# EAGLE board SparkFun_Micro_6DoF_LSM6DSV16X-Panel (EAGLE 9.6.2), part 1 of 8
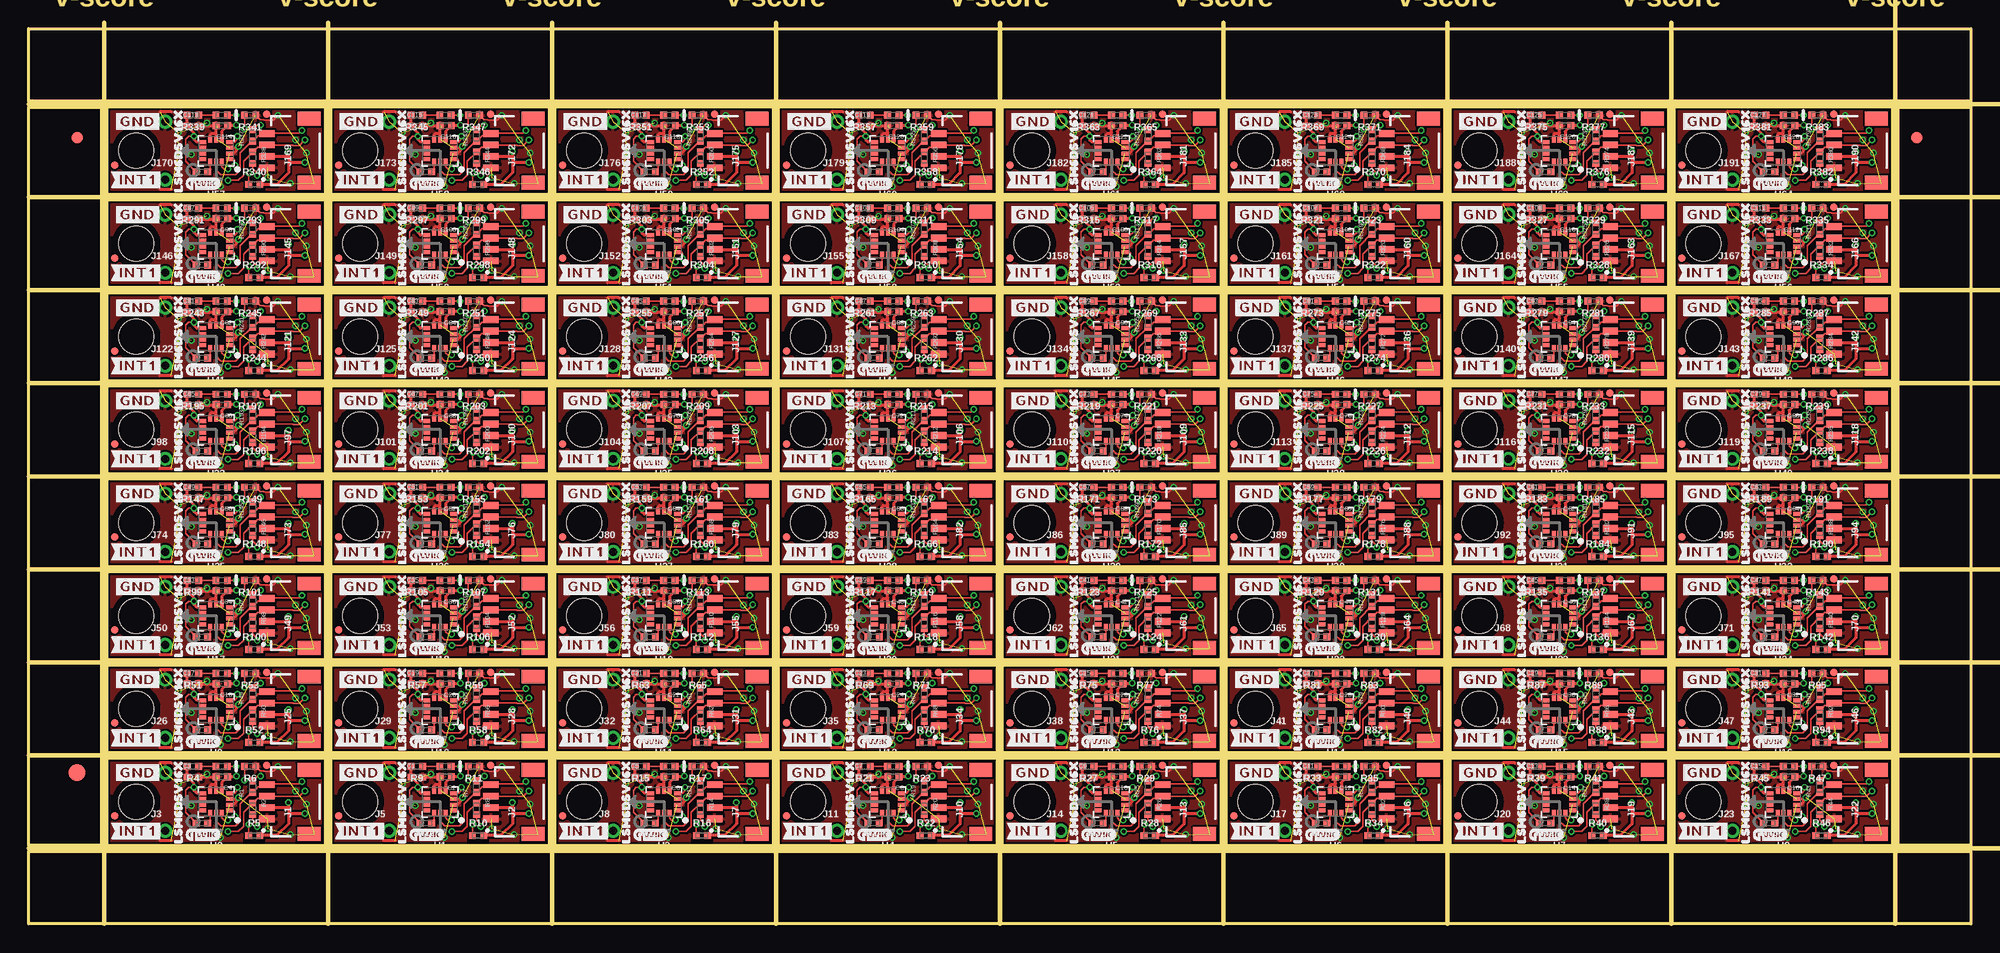
[diagram p0: board, top side]
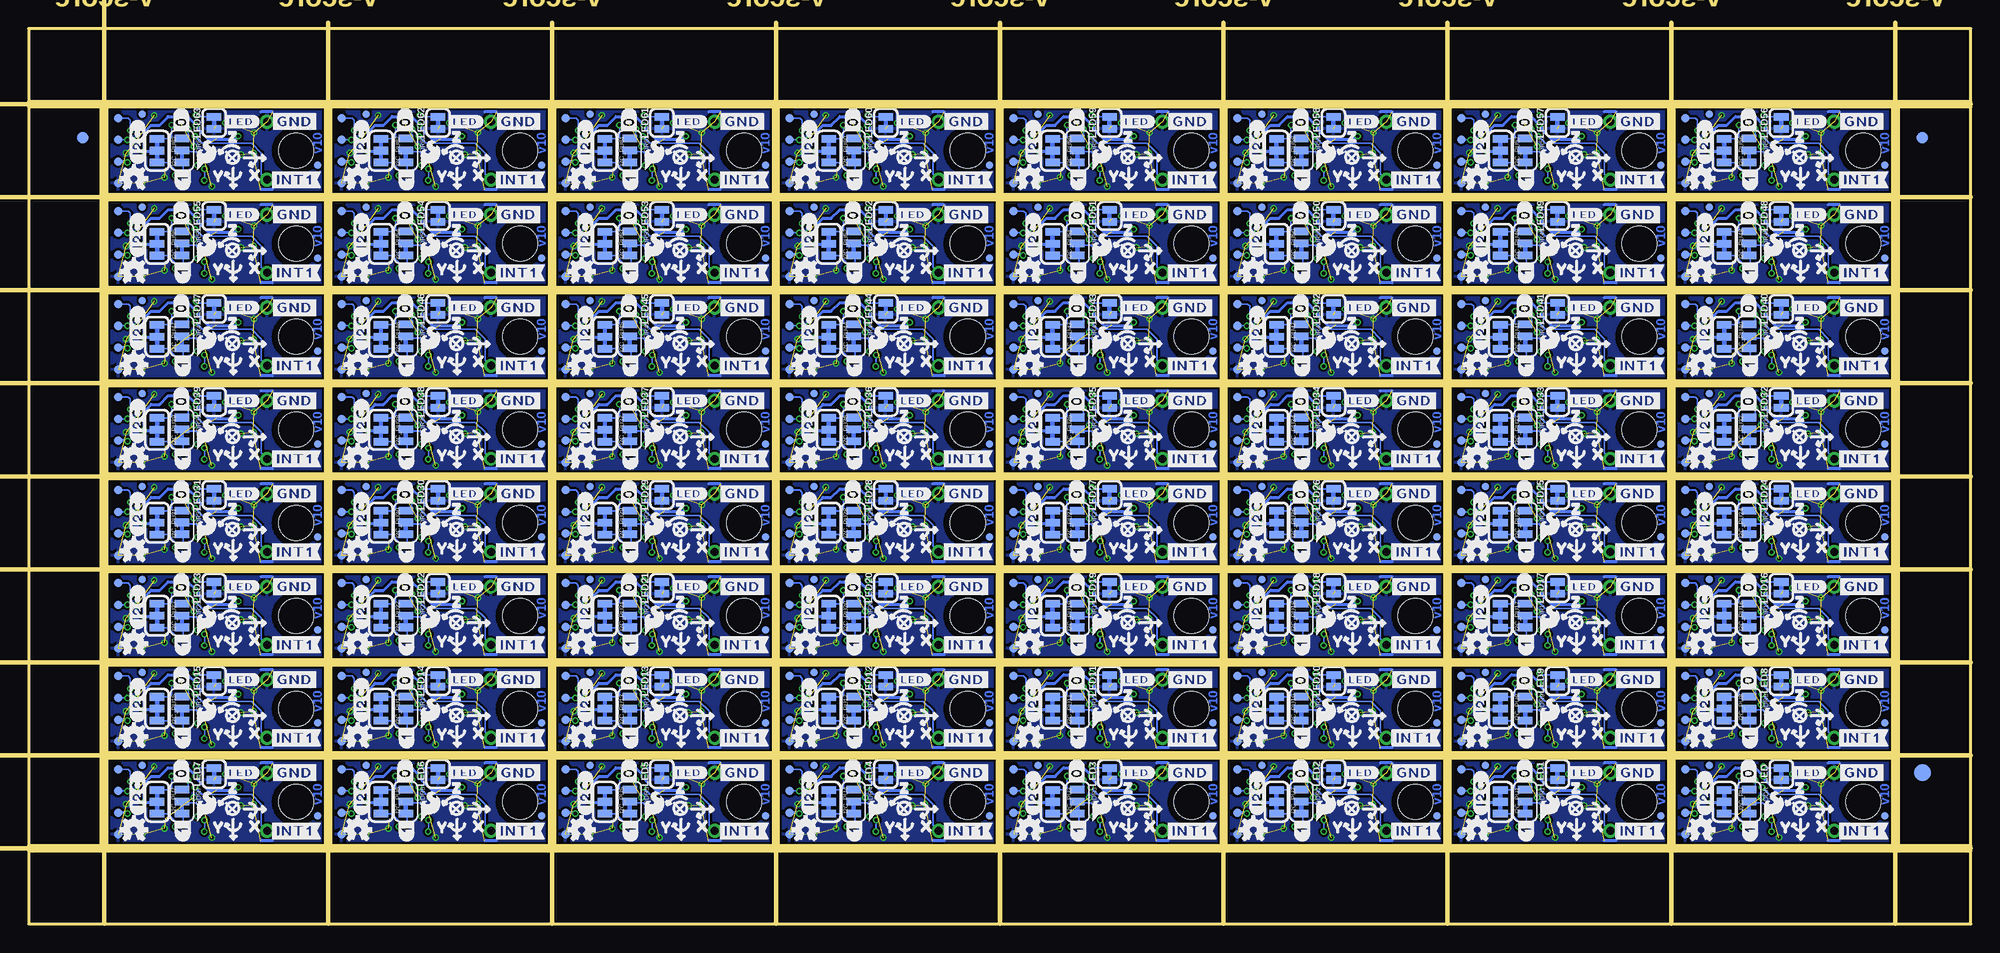
[diagram p1: board, bottom side, seen from below]

Size 169.67 x 78.23 mm. Coordinates in mm from the lower left corner, seen from the top.
Outline: 272 segments
Copper layers (1*16): Top 0.035mm / dielectric 1.5mm / Bottom 0.035mm
Design rules "SparkFun_Micro_6DoF_LSM6DSV16X": minimum track width 5mil, minimum drill 0.3mm, track to track 5mil, track to pad 5mil, pad to pad 5mil, via to via 5mil, smd to smd 5mil, copper to edge 7mil, drill to drill 7mil, minimum pad ring 5mil, minimum via ring 5mil, stop-mask expansion 2.5mil, vias tented up to drill 25mil, thermal gap 10mil
tRestrict: area 17.4,10.6 to 17.7,10.7; area 37,10.6 to 37.2,10.7; area 56.5,10.6 to 56.8,10.7; area 76.1,10.6 to 76.3,10.7; area 95.7,10.6 to 95.9,10.7; area 115.2,10.6 to 115.4,10.7; area 134.8,10.6 to 135,10.7; area 154.3,10.6 to 154.6,10.7; area 17.4,18.8 to 17.7,18.8; area 37,18.8 to 37.2,18.8; area 56.5,18.8 to 56.8,18.8; area 76.1,18.8 to 76.3,18.8; 52 more areas
Milling: 18 lines

## Footprints (pad centres in the part's own frame; a part is rotated, then mirrored left to right if it is on the bottom)
SMT-JUMPER_3_1-NC_TRACE_SILK = smd 0.66 x 1.27: 1 -1.041,0; 2 0,0; 3 1.041,0
0402-TIGHT = smd 0.6 x 0.6: 1 -0.5,0; 2 0.5,0
LED-0402 = smd 0.6 x 0.6: A -0.5,0; C 0.5,0
FIDUCIAL-1X2 = smd 1 x 1: 1 0,0
FIDUCIAL-1.5X3 = smd 1.5 x 1.5: 1 0,0
FIDUCIAL-MICRO = smd 0.635 x 0.635: 1 0,0
SMT-JUMPER_3_2-NC_TRACE_SILK = smd 0.66 x 1.27: 1 -1.041,0; 2 0,0; 3 1.041,0
JST04_1MM_RA = smd 0.6 x 1.35: 1 -1.5,0; 2 -0.5,0; 3 0.5,0; 4 1.5,0 | smd 1.2 x 2: NC1 2.8,-3.675; NC2 -2.8,-3.675
1X01_1MM_NO_SILK = drill 0.7 pad 1.2: 1 0,0
SMT-JUMPER_2_NC_TRACE_SILK = smd 0.66 x 1.27: 1 -0.521,0; 2 0.521,0
STAND-OFF-TIGHT = hole 3.048: 0,0
PAD.03X.03 = smd 0.762 x 0.762: 1 0,0
LGA-14L = smd 0.575 x 0.35: P1 -1.163,0.75; P2 -1.163,0.25; P3 -1.163,-0.25; P4 -1.163,-0.75; P8 1.163,-0.75; P9 1.163,-0.25; P10 1.163,0.25; P11 1.163,0.75 | smd 0.35 x 0.575: P5 -0.5,-1; P6 0,-1; P7 0.5,-1; P12 0.5,1; P13 0,1; P14 -0.5,1

## Placement (x,y rotation side)
ADDR  JUMPER-SMT_3_1-NC_TRACE_SILK  [SMT-JUMPER_3_1-NC_TRACE_SILK]  19.37,10.69 270 bottom
ADDR1  JUMPER-SMT_3_1-NC_TRACE_SILK  [SMT-JUMPER_3_1-NC_TRACE_SILK]  38.93,10.69 270 bottom
ADDR2  JUMPER-SMT_3_1-NC_TRACE_SILK  [SMT-JUMPER_3_1-NC_TRACE_SILK]  58.49,10.69 270 bottom
ADDR3  JUMPER-SMT_3_1-NC_TRACE_SILK  [SMT-JUMPER_3_1-NC_TRACE_SILK]  78.05,10.69 270 bottom
ADDR4  JUMPER-SMT_3_1-NC_TRACE_SILK  [SMT-JUMPER_3_1-NC_TRACE_SILK]  97.61,10.69 270 bottom
ADDR5  JUMPER-SMT_3_1-NC_TRACE_SILK  [SMT-JUMPER_3_1-NC_TRACE_SILK]  117.16,10.69 270 bottom
ADDR6  JUMPER-SMT_3_1-NC_TRACE_SILK  [SMT-JUMPER_3_1-NC_TRACE_SILK]  136.72,10.69 270 bottom
ADDR7  JUMPER-SMT_3_1-NC_TRACE_SILK  [SMT-JUMPER_3_1-NC_TRACE_SILK]  156.28,10.69 270 bottom
ADDR8  JUMPER-SMT_3_1-NC_TRACE_SILK  [SMT-JUMPER_3_1-NC_TRACE_SILK]  19.37,18.82 270 bottom
ADDR9  JUMPER-SMT_3_1-NC_TRACE_SILK  [SMT-JUMPER_3_1-NC_TRACE_SILK]  38.93,18.82 270 bottom
ADDR10  JUMPER-SMT_3_1-NC_TRACE_SILK  [SMT-JUMPER_3_1-NC_TRACE_SILK]  58.49,18.82 270 bottom
ADDR11  JUMPER-SMT_3_1-NC_TRACE_SILK  [SMT-JUMPER_3_1-NC_TRACE_SILK]  78.05,18.82 270 bottom
ADDR12  JUMPER-SMT_3_1-NC_TRACE_SILK  [SMT-JUMPER_3_1-NC_TRACE_SILK]  97.61,18.82 270 bottom
ADDR13  JUMPER-SMT_3_1-NC_TRACE_SILK  [SMT-JUMPER_3_1-NC_TRACE_SILK]  117.16,18.82 270 bottom
ADDR14  JUMPER-SMT_3_1-NC_TRACE_SILK  [SMT-JUMPER_3_1-NC_TRACE_SILK]  136.72,18.82 270 bottom
ADDR15  JUMPER-SMT_3_1-NC_TRACE_SILK  [SMT-JUMPER_3_1-NC_TRACE_SILK]  156.28,18.82 270 bottom
ADDR16  JUMPER-SMT_3_1-NC_TRACE_SILK  [SMT-JUMPER_3_1-NC_TRACE_SILK]  19.37,26.95 270 bottom
ADDR17  JUMPER-SMT_3_1-NC_TRACE_SILK  [SMT-JUMPER_3_1-NC_TRACE_SILK]  38.93,26.95 270 bottom
ADDR18  JUMPER-SMT_3_1-NC_TRACE_SILK  [SMT-JUMPER_3_1-NC_TRACE_SILK]  58.49,26.95 270 bottom
ADDR19  JUMPER-SMT_3_1-NC_TRACE_SILK  [SMT-JUMPER_3_1-NC_TRACE_SILK]  78.05,26.95 270 bottom
ADDR20  JUMPER-SMT_3_1-NC_TRACE_SILK  [SMT-JUMPER_3_1-NC_TRACE_SILK]  97.61,26.95 270 bottom
ADDR21  JUMPER-SMT_3_1-NC_TRACE_SILK  [SMT-JUMPER_3_1-NC_TRACE_SILK]  117.16,26.95 270 bottom
ADDR22  JUMPER-SMT_3_1-NC_TRACE_SILK  [SMT-JUMPER_3_1-NC_TRACE_SILK]  136.72,26.95 270 bottom
ADDR23  JUMPER-SMT_3_1-NC_TRACE_SILK  [SMT-JUMPER_3_1-NC_TRACE_SILK]  156.28,26.95 270 bottom
ADDR24  JUMPER-SMT_3_1-NC_TRACE_SILK  [SMT-JUMPER_3_1-NC_TRACE_SILK]  19.37,35.08 270 bottom
ADDR25  JUMPER-SMT_3_1-NC_TRACE_SILK  [SMT-JUMPER_3_1-NC_TRACE_SILK]  38.93,35.08 270 bottom
ADDR26  JUMPER-SMT_3_1-NC_TRACE_SILK  [SMT-JUMPER_3_1-NC_TRACE_SILK]  58.49,35.08 270 bottom
ADDR27  JUMPER-SMT_3_1-NC_TRACE_SILK  [SMT-JUMPER_3_1-NC_TRACE_SILK]  78.05,35.08 270 bottom
ADDR28  JUMPER-SMT_3_1-NC_TRACE_SILK  [SMT-JUMPER_3_1-NC_TRACE_SILK]  97.61,35.08 270 bottom
ADDR29  JUMPER-SMT_3_1-NC_TRACE_SILK  [SMT-JUMPER_3_1-NC_TRACE_SILK]  117.16,35.08 270 bottom
ADDR30  JUMPER-SMT_3_1-NC_TRACE_SILK  [SMT-JUMPER_3_1-NC_TRACE_SILK]  136.72,35.08 270 bottom
ADDR31  JUMPER-SMT_3_1-NC_TRACE_SILK  [SMT-JUMPER_3_1-NC_TRACE_SILK]  156.28,35.08 270 bottom
ADDR32  JUMPER-SMT_3_1-NC_TRACE_SILK  [SMT-JUMPER_3_1-NC_TRACE_SILK]  19.37,43.21 270 bottom
ADDR33  JUMPER-SMT_3_1-NC_TRACE_SILK  [SMT-JUMPER_3_1-NC_TRACE_SILK]  38.93,43.21 270 bottom
ADDR34  JUMPER-SMT_3_1-NC_TRACE_SILK  [SMT-JUMPER_3_1-NC_TRACE_SILK]  58.49,43.21 270 bottom
ADDR35  JUMPER-SMT_3_1-NC_TRACE_SILK  [SMT-JUMPER_3_1-NC_TRACE_SILK]  78.05,43.21 270 bottom
ADDR36  JUMPER-SMT_3_1-NC_TRACE_SILK  [SMT-JUMPER_3_1-NC_TRACE_SILK]  97.61,43.21 270 bottom
ADDR37  JUMPER-SMT_3_1-NC_TRACE_SILK  [SMT-JUMPER_3_1-NC_TRACE_SILK]  117.16,43.21 270 bottom
ADDR38  JUMPER-SMT_3_1-NC_TRACE_SILK  [SMT-JUMPER_3_1-NC_TRACE_SILK]  136.72,43.21 270 bottom
ADDR39  JUMPER-SMT_3_1-NC_TRACE_SILK  [SMT-JUMPER_3_1-NC_TRACE_SILK]  156.28,43.21 270 bottom
ADDR40  JUMPER-SMT_3_1-NC_TRACE_SILK  [SMT-JUMPER_3_1-NC_TRACE_SILK]  19.37,51.33 270 bottom
ADDR41  JUMPER-SMT_3_1-NC_TRACE_SILK  [SMT-JUMPER_3_1-NC_TRACE_SILK]  38.93,51.33 270 bottom
ADDR42  JUMPER-SMT_3_1-NC_TRACE_SILK  [SMT-JUMPER_3_1-NC_TRACE_SILK]  58.49,51.33 270 bottom
ADDR43  JUMPER-SMT_3_1-NC_TRACE_SILK  [SMT-JUMPER_3_1-NC_TRACE_SILK]  78.05,51.33 270 bottom
ADDR44  JUMPER-SMT_3_1-NC_TRACE_SILK  [SMT-JUMPER_3_1-NC_TRACE_SILK]  97.61,51.33 270 bottom
ADDR45  JUMPER-SMT_3_1-NC_TRACE_SILK  [SMT-JUMPER_3_1-NC_TRACE_SILK]  117.16,51.33 270 bottom
ADDR46  JUMPER-SMT_3_1-NC_TRACE_SILK  [SMT-JUMPER_3_1-NC_TRACE_SILK]  136.72,51.33 270 bottom
ADDR47  JUMPER-SMT_3_1-NC_TRACE_SILK  [SMT-JUMPER_3_1-NC_TRACE_SILK]  156.28,51.33 270 bottom
ADDR48  JUMPER-SMT_3_1-NC_TRACE_SILK  [SMT-JUMPER_3_1-NC_TRACE_SILK]  19.37,59.46 270 bottom
ADDR49  JUMPER-SMT_3_1-NC_TRACE_SILK  [SMT-JUMPER_3_1-NC_TRACE_SILK]  38.93,59.46 270 bottom
ADDR50  JUMPER-SMT_3_1-NC_TRACE_SILK  [SMT-JUMPER_3_1-NC_TRACE_SILK]  58.49,59.46 270 bottom
ADDR51  JUMPER-SMT_3_1-NC_TRACE_SILK  [SMT-JUMPER_3_1-NC_TRACE_SILK]  78.05,59.46 270 bottom
ADDR52  JUMPER-SMT_3_1-NC_TRACE_SILK  [SMT-JUMPER_3_1-NC_TRACE_SILK]  97.61,59.46 270 bottom
ADDR53  JUMPER-SMT_3_1-NC_TRACE_SILK  [SMT-JUMPER_3_1-NC_TRACE_SILK]  117.16,59.46 270 bottom
ADDR54  JUMPER-SMT_3_1-NC_TRACE_SILK  [SMT-JUMPER_3_1-NC_TRACE_SILK]  136.72,59.46 270 bottom
ADDR55  JUMPER-SMT_3_1-NC_TRACE_SILK  [SMT-JUMPER_3_1-NC_TRACE_SILK]  156.28,59.46 270 bottom
ADDR56  JUMPER-SMT_3_1-NC_TRACE_SILK  [SMT-JUMPER_3_1-NC_TRACE_SILK]  19.37,67.59 270 bottom
ADDR57  JUMPER-SMT_3_1-NC_TRACE_SILK  [SMT-JUMPER_3_1-NC_TRACE_SILK]  38.93,67.59 270 bottom
ADDR58  JUMPER-SMT_3_1-NC_TRACE_SILK  [SMT-JUMPER_3_1-NC_TRACE_SILK]  58.49,67.59 270 bottom
ADDR59  JUMPER-SMT_3_1-NC_TRACE_SILK  [SMT-JUMPER_3_1-NC_TRACE_SILK]  78.05,67.59 270 bottom
ADDR60  JUMPER-SMT_3_1-NC_TRACE_SILK  [SMT-JUMPER_3_1-NC_TRACE_SILK]  97.61,67.59 270 bottom
ADDR61  JUMPER-SMT_3_1-NC_TRACE_SILK  [SMT-JUMPER_3_1-NC_TRACE_SILK]  117.16,67.59 270 bottom
ADDR62  JUMPER-SMT_3_1-NC_TRACE_SILK  [SMT-JUMPER_3_1-NC_TRACE_SILK]  136.72,67.59 270 bottom
ADDR63  JUMPER-SMT_3_1-NC_TRACE_SILK  [SMT-JUMPER_3_1-NC_TRACE_SILK]  156.28,67.59 270 bottom
C1  0.1uF  [0402-TIGHT]  33.91,12.83 0 top
C2  0.1uF  [0402-TIGHT]  36.44,12.86 180 top
C3  0.1uF  [0402-TIGHT]  14.35,12.83 0 top
C4  0.1uF  [0402-TIGHT]  16.88,12.86 180 top
C5  0.1uF  [0402-TIGHT]  53.47,12.83 0 top
C6  0.1uF  [0402-TIGHT]  55.99,12.86 180 top
C7  0.1uF  [0402-TIGHT]  73.03,12.83 0 top
C8  0.1uF  [0402-TIGHT]  75.55,12.86 180 top
C9  0.1uF  [0402-TIGHT]  92.58,12.83 0 top
C10  0.1uF  [0402-TIGHT]  95.11,12.86 180 top
C11  0.1uF  [0402-TIGHT]  112.14,12.83 0 top
C12  0.1uF  [0402-TIGHT]  114.67,12.86 180 top
C13  0.1uF  [0402-TIGHT]  131.7,12.83 0 top
C14  0.1uF  [0402-TIGHT]  134.23,12.86 180 top
C15  0.1uF  [0402-TIGHT]  151.26,12.83 0 top
C16  0.1uF  [0402-TIGHT]  153.78,12.86 180 top
C17  0.1uF  [0402-TIGHT]  14.35,20.96 0 top
C18  0.1uF  [0402-TIGHT]  16.88,20.99 180 top
C19  0.1uF  [0402-TIGHT]  33.91,20.96 0 top
C20  0.1uF  [0402-TIGHT]  36.44,20.99 180 top
C21  0.1uF  [0402-TIGHT]  53.47,20.96 0 top
C22  0.1uF  [0402-TIGHT]  55.99,20.99 180 top
C23  0.1uF  [0402-TIGHT]  73.03,20.96 0 top
C24  0.1uF  [0402-TIGHT]  75.55,20.99 180 top
C25  0.1uF  [0402-TIGHT]  92.58,20.96 0 top
C26  0.1uF  [0402-TIGHT]  95.11,20.99 180 top
C27  0.1uF  [0402-TIGHT]  112.14,20.96 0 top
C28  0.1uF  [0402-TIGHT]  114.67,20.99 180 top
C29  0.1uF  [0402-TIGHT]  131.7,20.96 0 top
C30  0.1uF  [0402-TIGHT]  134.23,20.99 180 top
C31  0.1uF  [0402-TIGHT]  151.26,20.96 0 top
C32  0.1uF  [0402-TIGHT]  153.78,20.99 180 top
C33  0.1uF  [0402-TIGHT]  14.35,29.09 0 top
C34  0.1uF  [0402-TIGHT]  16.88,29.11 180 top
C35  0.1uF  [0402-TIGHT]  33.91,29.09 0 top
C36  0.1uF  [0402-TIGHT]  36.44,29.11 180 top
C37  0.1uF  [0402-TIGHT]  53.47,29.09 0 top
C38  0.1uF  [0402-TIGHT]  55.99,29.11 180 top
C39  0.1uF  [0402-TIGHT]  73.03,29.09 0 top
C40  0.1uF  [0402-TIGHT]  75.55,29.11 180 top
C41  0.1uF  [0402-TIGHT]  92.58,29.09 0 top
C42  0.1uF  [0402-TIGHT]  95.11,29.11 180 top
C43  0.1uF  [0402-TIGHT]  112.14,29.09 0 top
C44  0.1uF  [0402-TIGHT]  114.67,29.11 180 top
C45  0.1uF  [0402-TIGHT]  131.7,29.09 0 top
C46  0.1uF  [0402-TIGHT]  134.23,29.11 180 top
C47  0.1uF  [0402-TIGHT]  151.26,29.09 0 top
C48  0.1uF  [0402-TIGHT]  153.78,29.11 180 top
C49  0.1uF  [0402-TIGHT]  14.35,37.22 0 top
C50  0.1uF  [0402-TIGHT]  16.88,37.24 180 top
C51  0.1uF  [0402-TIGHT]  33.91,37.22 0 top
C52  0.1uF  [0402-TIGHT]  36.44,37.24 180 top
C53  0.1uF  [0402-TIGHT]  53.47,37.22 0 top
C54  0.1uF  [0402-TIGHT]  55.99,37.24 180 top
C55  0.1uF  [0402-TIGHT]  73.03,37.22 0 top
C56  0.1uF  [0402-TIGHT]  75.55,37.24 180 top
C57  0.1uF  [0402-TIGHT]  92.58,37.22 0 top
C58  0.1uF  [0402-TIGHT]  95.11,37.24 180 top
C59  0.1uF  [0402-TIGHT]  112.14,37.22 0 top
C60  0.1uF  [0402-TIGHT]  114.67,37.24 180 top
C61  0.1uF  [0402-TIGHT]  131.7,37.22 0 top
C62  0.1uF  [0402-TIGHT]  134.23,37.24 180 top
C63  0.1uF  [0402-TIGHT]  151.26,37.22 0 top
C64  0.1uF  [0402-TIGHT]  153.78,37.24 180 top
C65  0.1uF  [0402-TIGHT]  14.35,45.35 0 top
C66  0.1uF  [0402-TIGHT]  16.88,45.37 180 top
C67  0.1uF  [0402-TIGHT]  33.91,45.35 0 top
C68  0.1uF  [0402-TIGHT]  36.44,45.37 180 top
C69  0.1uF  [0402-TIGHT]  53.47,45.35 0 top
C70  0.1uF  [0402-TIGHT]  55.99,45.37 180 top
C71  0.1uF  [0402-TIGHT]  73.03,45.35 0 top
C72  0.1uF  [0402-TIGHT]  75.55,45.37 180 top
C73  0.1uF  [0402-TIGHT]  92.58,45.35 0 top
C74  0.1uF  [0402-TIGHT]  95.11,45.37 180 top
C75  0.1uF  [0402-TIGHT]  112.14,45.35 0 top
C76  0.1uF  [0402-TIGHT]  114.67,45.37 180 top
C77  0.1uF  [0402-TIGHT]  131.7,45.35 0 top
C78  0.1uF  [0402-TIGHT]  134.23,45.37 180 top
C79  0.1uF  [0402-TIGHT]  151.26,45.35 0 top
C80  0.1uF  [0402-TIGHT]  153.78,45.37 180 top
C81  0.1uF  [0402-TIGHT]  14.35,53.47 0 top
C82  0.1uF  [0402-TIGHT]  16.88,53.5 180 top
C83  0.1uF  [0402-TIGHT]  33.91,53.47 0 top
C84  0.1uF  [0402-TIGHT]  36.44,53.5 180 top
C85  0.1uF  [0402-TIGHT]  53.47,53.47 0 top
C86  0.1uF  [0402-TIGHT]  55.99,53.5 180 top
C87  0.1uF  [0402-TIGHT]  73.03,53.47 0 top
C88  0.1uF  [0402-TIGHT]  75.55,53.5 180 top
C89  0.1uF  [0402-TIGHT]  92.58,53.47 0 top
C90  0.1uF  [0402-TIGHT]  95.11,53.5 180 top
C91  0.1uF  [0402-TIGHT]  112.14,53.47 0 top
C92  0.1uF  [0402-TIGHT]  114.67,53.5 180 top
C93  0.1uF  [0402-TIGHT]  131.7,53.47 0 top
C94  0.1uF  [0402-TIGHT]  134.23,53.5 180 top
C95  0.1uF  [0402-TIGHT]  151.26,53.47 0 top
C96  0.1uF  [0402-TIGHT]  153.78,53.5 180 top
C97  0.1uF  [0402-TIGHT]  14.35,61.6 0 top
C98  0.1uF  [0402-TIGHT]  16.88,61.63 180 top
C99  0.1uF  [0402-TIGHT]  33.91,61.6 0 top
C100  0.1uF  [0402-TIGHT]  36.44,61.63 180 top
C101  0.1uF  [0402-TIGHT]  53.47,61.6 0 top
C102  0.1uF  [0402-TIGHT]  55.99,61.63 180 top
C103  0.1uF  [0402-TIGHT]  73.03,61.6 0 top
C104  0.1uF  [0402-TIGHT]  75.55,61.63 180 top
C105  0.1uF  [0402-TIGHT]  92.58,61.6 0 top
C106  0.1uF  [0402-TIGHT]  95.11,61.63 180 top
C107  0.1uF  [0402-TIGHT]  112.14,61.6 0 top
C108  0.1uF  [0402-TIGHT]  114.67,61.63 180 top
C109  0.1uF  [0402-TIGHT]  131.7,61.6 0 top
C110  0.1uF  [0402-TIGHT]  134.23,61.63 180 top
C111  0.1uF  [0402-TIGHT]  151.26,61.6 0 top
C112  0.1uF  [0402-TIGHT]  153.78,61.63 180 top
C113  0.1uF  [0402-TIGHT]  14.35,69.73 0 top
C114  0.1uF  [0402-TIGHT]  16.88,69.75 180 top
C115  0.1uF  [0402-TIGHT]  33.91,69.73 0 top
C116  0.1uF  [0402-TIGHT]  36.44,69.75 180 top
C117  0.1uF  [0402-TIGHT]  53.47,69.73 0 top
C118  0.1uF  [0402-TIGHT]  55.99,69.75 180 top
C119  0.1uF  [0402-TIGHT]  73.03,69.73 0 top
C120  0.1uF  [0402-TIGHT]  75.55,69.75 180 top
C121  0.1uF  [0402-TIGHT]  92.58,69.73 0 top
C122  0.1uF  [0402-TIGHT]  95.11,69.75 180 top
C123  0.1uF  [0402-TIGHT]  112.14,69.73 0 top
C124  0.1uF  [0402-TIGHT]  114.67,69.75 180 top
C125  0.1uF  [0402-TIGHT]  131.7,69.73 0 top
C126  0.1uF  [0402-TIGHT]  134.23,69.75 180 top
C127  0.1uF  [0402-TIGHT]  151.26,69.73 0 top
C128  0.1uF  [0402-TIGHT]  153.78,69.75 180 top
D1  RED  [LED-0402]  16.87,13.77 0 top
D2  RED  [LED-0402]  36.42,13.77 0 top
D3  RED  [LED-0402]  55.98,13.77 0 top
D4  RED  [LED-0402]  75.54,13.77 0 top
D5  RED  [LED-0402]  95.1,13.77 0 top
D6  RED  [LED-0402]  114.66,13.77 0 top
D7  RED  [LED-0402]  134.21,13.77 0 top
D8  RED  [LED-0402]  153.77,13.77 0 top
D9  RED  [LED-0402]  16.87,21.89 0 top
D10  RED  [LED-0402]  36.42,21.89 0 top
D11  RED  [LED-0402]  55.98,21.89 0 top
D12  RED  [LED-0402]  75.54,21.89 0 top
D13  RED  [LED-0402]  95.1,21.89 0 top
D14  RED  [LED-0402]  114.66,21.89 0 top
D15  RED  [LED-0402]  134.21,21.89 0 top
D16  RED  [LED-0402]  153.77,21.89 0 top
D17  RED  [LED-0402]  16.87,30.02 0 top
D18  RED  [LED-0402]  36.42,30.02 0 top
D19  RED  [LED-0402]  55.98,30.02 0 top
D20  RED  [LED-0402]  75.54,30.02 0 top
D21  RED  [LED-0402]  95.1,30.02 0 top
D22  RED  [LED-0402]  114.66,30.02 0 top
D23  RED  [LED-0402]  134.21,30.02 0 top
D24  RED  [LED-0402]  153.77,30.02 0 top
D25  RED  [LED-0402]  16.87,38.15 0 top
D26  RED  [LED-0402]  36.42,38.15 0 top
D27  RED  [LED-0402]  55.98,38.15 0 top
D28  RED  [LED-0402]  75.54,38.15 0 top
D29  RED  [LED-0402]  95.1,38.15 0 top
D30  RED  [LED-0402]  114.66,38.15 0 top
D31  RED  [LED-0402]  134.21,38.15 0 top
D32  RED  [LED-0402]  153.77,38.15 0 top
D33  RED  [LED-0402]  16.87,46.28 0 top
D34  RED  [LED-0402]  36.42,46.28 0 top
D35  RED  [LED-0402]  55.98,46.28 0 top
D36  RED  [LED-0402]  75.54,46.28 0 top
D37  RED  [LED-0402]  95.1,46.28 0 top
D38  RED  [LED-0402]  114.66,46.28 0 top
D39  RED  [LED-0402]  134.21,46.28 0 top
D40  RED  [LED-0402]  153.77,46.28 0 top
D41  RED  [LED-0402]  16.87,54.41 0 top
D42  RED  [LED-0402]  36.42,54.41 0 top
D43  RED  [LED-0402]  55.98,54.41 0 top
D44  RED  [LED-0402]  75.54,54.41 0 top
D45  RED  [LED-0402]  95.1,54.41 0 top
D46  RED  [LED-0402]  114.66,54.41 0 top
D47  RED  [LED-0402]  134.21,54.41 0 top
D48  RED  [LED-0402]  153.77,54.41 0 top
D49  RED  [LED-0402]  16.87,62.53 0 top
D50  RED  [LED-0402]  36.42,62.53 0 top
D51  RED  [LED-0402]  55.98,62.53 0 top
D52  RED  [LED-0402]  75.54,62.53 0 top
D53  RED  [LED-0402]  95.1,62.53 0 top
D54  RED  [LED-0402]  114.66,62.53 0 top
D55  RED  [LED-0402]  134.21,62.53 0 top
D56  RED  [LED-0402]  153.77,62.53 0 top
D57  RED  [LED-0402]  16.87,70.66 0 top
D58  RED  [LED-0402]  36.42,70.66 0 top
D59  RED  [LED-0402]  55.98,70.66 0 top
D60  RED  [LED-0402]  75.54,70.66 0 top
D61  RED  [LED-0402]  95.1,70.66 0 top
D62  RED  [LED-0402]  114.66,70.66 0 top
D63  RED  [LED-0402]  134.21,70.66 0 top
D64  RED  [LED-0402]  153.77,70.66 0 top
E$1  [FIDUCIAL-1X2]  4.23,68.71 0 top
E$2  [FIDUCIAL-1X2]  4.23,68.71 0 bottom
E$3  [FIDUCIAL-1X2]  164.93,68.71 0 top
E$4  [FIDUCIAL-1X2]  164.93,68.71 0 bottom
E$5  [FIDUCIAL-1.5X3]  4.23,13.21 0 top
E$6  [FIDUCIAL-1.5X3]  4.23,13.21 0 bottom
FD1  FIDUCIALUFIDUCIAL  [FIDUCIAL-MICRO]  22.83,13.84 0 bottom
FD2  FIDUCIALUFIDUCIAL  [FIDUCIAL-MICRO]  7.52,9.42 0 bottom
FD3  FIDUCIALUFIDUCIAL  [FIDUCIAL-MICRO]  42.39,13.84 0 bottom
FD4  FIDUCIALUFIDUCIAL  [FIDUCIAL-MICRO]  27.08,9.42 0 bottom
FD5  FIDUCIALUFIDUCIAL  [FIDUCIAL-MICRO]  61.95,13.84 0 bottom
FD6  FIDUCIALUFIDUCIAL  [FIDUCIAL-MICRO]  46.63,9.42 0 bottom
FD7  FIDUCIALUFIDUCIAL  [FIDUCIAL-MICRO]  81.51,13.84 0 bottom
FD8  FIDUCIALUFIDUCIAL  [FIDUCIAL-MICRO]  66.19,9.42 0 bottom
FD9  FIDUCIALUFIDUCIAL  [FIDUCIAL-MICRO]  101.07,13.84 0 bottom
FD10  FIDUCIALUFIDUCIAL  [FIDUCIAL-MICRO]  85.75,9.42 0 bottom
FD11  FIDUCIALUFIDUCIAL  [FIDUCIAL-MICRO]  120.62,13.84 0 bottom
FD12  FIDUCIALUFIDUCIAL  [FIDUCIAL-MICRO]  105.31,9.42 0 bottom
FD13  FIDUCIALUFIDUCIAL  [FIDUCIAL-MICRO]  140.18,13.84 0 bottom
FD14  FIDUCIALUFIDUCIAL  [FIDUCIAL-MICRO]  124.87,9.42 0 bottom
FD15  FIDUCIALUFIDUCIAL  [FIDUCIAL-MICRO]  159.74,13.84 0 bottom
FD16  FIDUCIALUFIDUCIAL  [FIDUCIAL-MICRO]  144.42,9.42 0 bottom
FD17  FIDUCIALUFIDUCIAL  [FIDUCIAL-MICRO]  22.83,21.97 0 bottom
FD18  FIDUCIALUFIDUCIAL  [FIDUCIAL-MICRO]  7.52,17.55 0 bottom
FD19  FIDUCIALUFIDUCIAL  [FIDUCIAL-MICRO]  42.39,21.97 0 bottom
FD20  FIDUCIALUFIDUCIAL  [FIDUCIAL-MICRO]  27.08,17.55 0 bottom
FD21  FIDUCIALUFIDUCIAL  [FIDUCIAL-MICRO]  61.95,21.97 0 bottom
FD22  FIDUCIALUFIDUCIAL  [FIDUCIAL-MICRO]  46.63,17.55 0 bottom
FD23  FIDUCIALUFIDUCIAL  [FIDUCIAL-MICRO]  81.51,21.97 0 bottom
FD24  FIDUCIALUFIDUCIAL  [FIDUCIAL-MICRO]  66.19,17.55 0 bottom
FD25  FIDUCIALUFIDUCIAL  [FIDUCIAL-MICRO]  101.07,21.97 0 bottom
FD26  FIDUCIALUFIDUCIAL  [FIDUCIAL-MICRO]  85.75,17.55 0 bottom
FD27  FIDUCIALUFIDUCIAL  [FIDUCIAL-MICRO]  120.62,21.97 0 bottom
FD28  FIDUCIALUFIDUCIAL  [FIDUCIAL-MICRO]  105.31,17.55 0 bottom
FD29  FIDUCIALUFIDUCIAL  [FIDUCIAL-MICRO]  140.18,21.97 0 bottom
FD30  FIDUCIALUFIDUCIAL  [FIDUCIAL-MICRO]  124.87,17.55 0 bottom
FD31  FIDUCIALUFIDUCIAL  [FIDUCIAL-MICRO]  159.74,21.97 0 bottom
FD32  FIDUCIALUFIDUCIAL  [FIDUCIAL-MICRO]  144.42,17.55 0 bottom
FD33  FIDUCIALUFIDUCIAL  [FIDUCIAL-MICRO]  22.83,30.1 0 bottom
FD34  FIDUCIALUFIDUCIAL  [FIDUCIAL-MICRO]  7.52,25.68 0 bottom
FD35  FIDUCIALUFIDUCIAL  [FIDUCIAL-MICRO]  42.39,30.1 0 bottom
FD36  FIDUCIALUFIDUCIAL  [FIDUCIAL-MICRO]  27.08,25.68 0 bottom
FD37  FIDUCIALUFIDUCIAL  [FIDUCIAL-MICRO]  61.95,30.1 0 bottom
FD38  FIDUCIALUFIDUCIAL  [FIDUCIAL-MICRO]  46.63,25.68 0 bottom
FD39  FIDUCIALUFIDUCIAL  [FIDUCIAL-MICRO]  81.51,30.1 0 bottom
FD40  FIDUCIALUFIDUCIAL  [FIDUCIAL-MICRO]  66.19,25.68 0 bottom
FD41  FIDUCIALUFIDUCIAL  [FIDUCIAL-MICRO]  101.07,30.1 0 bottom
FD42  FIDUCIALUFIDUCIAL  [FIDUCIAL-MICRO]  85.75,25.68 0 bottom
FD43  FIDUCIALUFIDUCIAL  [FIDUCIAL-MICRO]  120.62,30.1 0 bottom
FD44  FIDUCIALUFIDUCIAL  [FIDUCIAL-MICRO]  105.31,25.68 0 bottom
FD45  FIDUCIALUFIDUCIAL  [FIDUCIAL-MICRO]  140.18,30.1 0 bottom
FD46  FIDUCIALUFIDUCIAL  [FIDUCIAL-MICRO]  124.87,25.68 0 bottom
FD47  FIDUCIALUFIDUCIAL  [FIDUCIAL-MICRO]  159.74,30.1 0 bottom
FD48  FIDUCIALUFIDUCIAL  [FIDUCIAL-MICRO]  144.42,25.68 0 bottom
FD49  FIDUCIALUFIDUCIAL  [FIDUCIAL-MICRO]  22.83,38.23 0 bottom
FD50  FIDUCIALUFIDUCIAL  [FIDUCIAL-MICRO]  7.52,33.81 0 bottom
FD51  FIDUCIALUFIDUCIAL  [FIDUCIAL-MICRO]  42.39,38.23 0 bottom
FD52  FIDUCIALUFIDUCIAL  [FIDUCIAL-MICRO]  27.08,33.81 0 bottom
FD53  FIDUCIALUFIDUCIAL  [FIDUCIAL-MICRO]  61.95,38.23 0 bottom
FD54  FIDUCIALUFIDUCIAL  [FIDUCIAL-MICRO]  46.63,33.81 0 bottom
FD55  FIDUCIALUFIDUCIAL  [FIDUCIAL-MICRO]  81.51,38.23 0 bottom
FD56  FIDUCIALUFIDUCIAL  [FIDUCIAL-MICRO]  66.19,33.81 0 bottom
FD57  FIDUCIALUFIDUCIAL  [FIDUCIAL-MICRO]  101.07,38.23 0 bottom
FD58  FIDUCIALUFIDUCIAL  [FIDUCIAL-MICRO]  85.75,33.81 0 bottom
FD59  FIDUCIALUFIDUCIAL  [FIDUCIAL-MICRO]  120.62,38.23 0 bottom
FD60  FIDUCIALUFIDUCIAL  [FIDUCIAL-MICRO]  105.31,33.81 0 bottom
FD61  FIDUCIALUFIDUCIAL  [FIDUCIAL-MICRO]  140.18,38.23 0 bottom
FD62  FIDUCIALUFIDUCIAL  [FIDUCIAL-MICRO]  124.87,33.81 0 bottom
FD63  FIDUCIALUFIDUCIAL  [FIDUCIAL-MICRO]  159.74,38.23 0 bottom
FD64  FIDUCIALUFIDUCIAL  [FIDUCIAL-MICRO]  144.42,33.81 0 bottom
FD65  FIDUCIALUFIDUCIAL  [FIDUCIAL-MICRO]  22.83,46.35 0 bottom
FD66  FIDUCIALUFIDUCIAL  [FIDUCIAL-MICRO]  7.52,41.94 0 bottom
FD67  FIDUCIALUFIDUCIAL  [FIDUCIAL-MICRO]  42.39,46.35 0 bottom
FD68  FIDUCIALUFIDUCIAL  [FIDUCIAL-MICRO]  27.08,41.94 0 bottom
FD69  FIDUCIALUFIDUCIAL  [FIDUCIAL-MICRO]  61.95,46.35 0 bottom
FD70  FIDUCIALUFIDUCIAL  [FIDUCIAL-MICRO]  46.63,41.94 0 bottom
FD71  FIDUCIALUFIDUCIAL  [FIDUCIAL-MICRO]  81.51,46.35 0 bottom
FD72  FIDUCIALUFIDUCIAL  [FIDUCIAL-MICRO]  66.19,41.94 0 bottom
FD73  FIDUCIALUFIDUCIAL  [FIDUCIAL-MICRO]  101.07,46.35 0 bottom
FD74  FIDUCIALUFIDUCIAL  [FIDUCIAL-MICRO]  85.75,41.94 0 bottom
FD75  FIDUCIALUFIDUCIAL  [FIDUCIAL-MICRO]  120.62,46.35 0 bottom
FD76  FIDUCIALUFIDUCIAL  [FIDUCIAL-MICRO]  105.31,41.94 0 bottom
FD77  FIDUCIALUFIDUCIAL  [FIDUCIAL-MICRO]  140.18,46.35 0 bottom
FD78  FIDUCIALUFIDUCIAL  [FIDUCIAL-MICRO]  124.87,41.94 0 bottom
FD79  FIDUCIALUFIDUCIAL  [FIDUCIAL-MICRO]  159.74,46.35 0 bottom
FD80  FIDUCIALUFIDUCIAL  [FIDUCIAL-MICRO]  144.42,41.94 0 bottom
FD81  FIDUCIALUFIDUCIAL  [FIDUCIAL-MICRO]  22.83,54.48 0 bottom
FD82  FIDUCIALUFIDUCIAL  [FIDUCIAL-MICRO]  7.52,50.06 0 bottom
FD83  FIDUCIALUFIDUCIAL  [FIDUCIAL-MICRO]  42.39,54.48 0 bottom
FD84  FIDUCIALUFIDUCIAL  [FIDUCIAL-MICRO]  27.08,50.06 0 bottom
FD85  FIDUCIALUFIDUCIAL  [FIDUCIAL-MICRO]  61.95,54.48 0 bottom
FD86  FIDUCIALUFIDUCIAL  [FIDUCIAL-MICRO]  46.63,50.06 0 bottom
FD87  FIDUCIALUFIDUCIAL  [FIDUCIAL-MICRO]  81.51,54.48 0 bottom
FD88  FIDUCIALUFIDUCIAL  [FIDUCIAL-MICRO]  66.19,50.06 0 bottom
FD89  FIDUCIALUFIDUCIAL  [FIDUCIAL-MICRO]  101.07,54.48 0 bottom
FD90  FIDUCIALUFIDUCIAL  [FIDUCIAL-MICRO]  85.75,50.06 0 bottom
FD91  FIDUCIALUFIDUCIAL  [FIDUCIAL-MICRO]  120.62,54.48 0 bottom
FD92  FIDUCIALUFIDUCIAL  [FIDUCIAL-MICRO]  105.31,50.06 0 bottom
FD93  FIDUCIALUFIDUCIAL  [FIDUCIAL-MICRO]  140.18,54.48 0 bottom
FD94  FIDUCIALUFIDUCIAL  [FIDUCIAL-MICRO]  124.87,50.06 0 bottom
FD95  FIDUCIALUFIDUCIAL  [FIDUCIAL-MICRO]  159.74,54.48 0 bottom
FD96  FIDUCIALUFIDUCIAL  [FIDUCIAL-MICRO]  144.42,50.06 0 bottom
FD97  FIDUCIALUFIDUCIAL  [FIDUCIAL-MICRO]  22.83,62.61 0 bottom
FD98  FIDUCIALUFIDUCIAL  [FIDUCIAL-MICRO]  7.52,58.19 0 bottom
FD99  FIDUCIALUFIDUCIAL  [FIDUCIAL-MICRO]  42.39,62.61 0 bottom
FD100  FIDUCIALUFIDUCIAL  [FIDUCIAL-MICRO]  27.08,58.19 0 bottom
FD101  FIDUCIALUFIDUCIAL  [FIDUCIAL-MICRO]  61.95,62.61 0 bottom
FD102  FIDUCIALUFIDUCIAL  [FIDUCIAL-MICRO]  46.63,58.19 0 bottom
FD103  FIDUCIALUFIDUCIAL  [FIDUCIAL-MICRO]  81.51,62.61 0 bottom
FD104  FIDUCIALUFIDUCIAL  [FIDUCIAL-MICRO]  66.19,58.19 0 bottom
FD105  FIDUCIALUFIDUCIAL  [FIDUCIAL-MICRO]  101.07,62.61 0 bottom
FD106  FIDUCIALUFIDUCIAL  [FIDUCIAL-MICRO]  85.75,58.19 0 bottom
FD107  FIDUCIALUFIDUCIAL  [FIDUCIAL-MICRO]  120.62,62.61 0 bottom
FD108  FIDUCIALUFIDUCIAL  [FIDUCIAL-MICRO]  105.31,58.19 0 bottom
FD109  FIDUCIALUFIDUCIAL  [FIDUCIAL-MICRO]  140.18,62.61 0 bottom
FD110  FIDUCIALUFIDUCIAL  [FIDUCIAL-MICRO]  124.87,58.19 0 bottom
FD111  FIDUCIALUFIDUCIAL  [FIDUCIAL-MICRO]  159.74,62.61 0 bottom
FD112  FIDUCIALUFIDUCIAL  [FIDUCIAL-MICRO]  144.42,58.19 0 bottom
FD113  FIDUCIALUFIDUCIAL  [FIDUCIAL-MICRO]  22.83,70.74 0 bottom
FD114  FIDUCIALUFIDUCIAL  [FIDUCIAL-MICRO]  7.52,66.32 0 bottom
FD115  FIDUCIALUFIDUCIAL  [FIDUCIAL-MICRO]  42.39,70.74 0 bottom
FD116  FIDUCIALUFIDUCIAL  [FIDUCIAL-MICRO]  27.08,66.32 0 bottom
FD117  FIDUCIALUFIDUCIAL  [FIDUCIAL-MICRO]  61.95,70.74 0 bottom
FD118  FIDUCIALUFIDUCIAL  [FIDUCIAL-MICRO]  46.63,66.32 0 bottom
FD119  FIDUCIALUFIDUCIAL  [FIDUCIAL-MICRO]  81.51,70.74 0 bottom
FD120  FIDUCIALUFIDUCIAL  [FIDUCIAL-MICRO]  66.19,66.32 0 bottom
FD121  FIDUCIALUFIDUCIAL  [FIDUCIAL-MICRO]  101.07,70.74 0 bottom
FD122  FIDUCIALUFIDUCIAL  [FIDUCIAL-MICRO]  85.75,66.32 0 bottom
FD123  FIDUCIALUFIDUCIAL  [FIDUCIAL-MICRO]  120.62,70.74 0 bottom
FD124  FIDUCIALUFIDUCIAL  [FIDUCIAL-MICRO]  105.31,66.32 0 bottom
FD125  FIDUCIALUFIDUCIAL  [FIDUCIAL-MICRO]  140.18,70.74 0 bottom
FD126  FIDUCIALUFIDUCIAL  [FIDUCIAL-MICRO]  124.87,66.32 0 bottom
FD127  FIDUCIALUFIDUCIAL  [FIDUCIAL-MICRO]  159.74,70.74 0 bottom
FD128  FIDUCIALUFIDUCIAL  [FIDUCIAL-MICRO]  144.42,66.32 0 bottom
FID1  FIDUCIALUFIDUCIAL  [FIDUCIAL-MICRO]  20.8,13.87 0 top
FID2  FIDUCIALUFIDUCIAL  [FIDUCIAL-MICRO]  7.52,9.42 0 top
FID3  FIDUCIALUFIDUCIAL  [FIDUCIAL-MICRO]  40.36,13.87 0 top
FID4  FIDUCIALUFIDUCIAL  [FIDUCIAL-MICRO]  27.08,9.42 0 top
FID5  FIDUCIALUFIDUCIAL  [FIDUCIAL-MICRO]  59.92,13.87 0 top
FID6  FIDUCIALUFIDUCIAL  [FIDUCIAL-MICRO]  46.63,9.42 0 top
FID7  FIDUCIALUFIDUCIAL  [FIDUCIAL-MICRO]  79.48,13.87 0 top
FID8  FIDUCIALUFIDUCIAL  [FIDUCIAL-MICRO]  66.19,9.42 0 top
FID9  FIDUCIALUFIDUCIAL  [FIDUCIAL-MICRO]  99.03,13.87 0 top
FID10  FIDUCIALUFIDUCIAL  [FIDUCIAL-MICRO]  85.75,9.42 0 top
FID11  FIDUCIALUFIDUCIAL  [FIDUCIAL-MICRO]  118.59,13.87 0 top
FID12  FIDUCIALUFIDUCIAL  [FIDUCIAL-MICRO]  105.31,9.42 0 top
FID13  FIDUCIALUFIDUCIAL  [FIDUCIAL-MICRO]  138.15,13.87 0 top
FID14  FIDUCIALUFIDUCIAL  [FIDUCIAL-MICRO]  124.87,9.42 0 top
FID15  FIDUCIALUFIDUCIAL  [FIDUCIAL-MICRO]  157.71,13.87 0 top
FID16  FIDUCIALUFIDUCIAL  [FIDUCIAL-MICRO]  144.42,9.42 0 top
FID17  FIDUCIALUFIDUCIAL  [FIDUCIAL-MICRO]  20.8,22 0 top
FID18  FIDUCIALUFIDUCIAL  [FIDUCIAL-MICRO]  7.52,17.55 0 top
FID19  FIDUCIALUFIDUCIAL  [FIDUCIAL-MICRO]  40.36,22 0 top
FID20  FIDUCIALUFIDUCIAL  [FIDUCIAL-MICRO]  27.08,17.55 0 top
FID21  FIDUCIALUFIDUCIAL  [FIDUCIAL-MICRO]  59.92,22 0 top
FID22  FIDUCIALUFIDUCIAL  [FIDUCIAL-MICRO]  46.63,17.55 0 top
FID23  FIDUCIALUFIDUCIAL  [FIDUCIAL-MICRO]  79.48,22 0 top
FID24  FIDUCIALUFIDUCIAL  [FIDUCIAL-MICRO]  66.19,17.55 0 top
FID25  FIDUCIALUFIDUCIAL  [FIDUCIAL-MICRO]  99.03,22 0 top
FID26  FIDUCIALUFIDUCIAL  [FIDUCIAL-MICRO]  85.75,17.55 0 top
FID27  FIDUCIALUFIDUCIAL  [FIDUCIAL-MICRO]  118.59,22 0 top
FID28  FIDUCIALUFIDUCIAL  [FIDUCIAL-MICRO]  105.31,17.55 0 top
FID29  FIDUCIALUFIDUCIAL  [FIDUCIAL-MICRO]  138.15,22 0 top
FID30  FIDUCIALUFIDUCIAL  [FIDUCIAL-MICRO]  124.87,17.55 0 top
FID31  FIDUCIALUFIDUCIAL  [FIDUCIAL-MICRO]  157.71,22 0 top
FID32  FIDUCIALUFIDUCIAL  [FIDUCIAL-MICRO]  144.42,17.55 0 top
FID33  FIDUCIALUFIDUCIAL  [FIDUCIAL-MICRO]  20.8,30.12 0 top
FID34  FIDUCIALUFIDUCIAL  [FIDUCIAL-MICRO]  7.52,25.68 0 top
FID35  FIDUCIALUFIDUCIAL  [FIDUCIAL-MICRO]  40.36,30.12 0 top
FID36  FIDUCIALUFIDUCIAL  [FIDUCIAL-MICRO]  27.08,25.68 0 top
FID37  FIDUCIALUFIDUCIAL  [FIDUCIAL-MICRO]  59.92,30.12 0 top
FID38  FIDUCIALUFIDUCIAL  [FIDUCIAL-MICRO]  46.63,25.68 0 top
FID39  FIDUCIALUFIDUCIAL  [FIDUCIAL-MICRO]  79.48,30.12 0 top
FID40  FIDUCIALUFIDUCIAL  [FIDUCIAL-MICRO]  66.19,25.68 0 top
FID41  FIDUCIALUFIDUCIAL  [FIDUCIAL-MICRO]  99.03,30.12 0 top
FID42  FIDUCIALUFIDUCIAL  [FIDUCIAL-MICRO]  85.75,25.68 0 top
FID43  FIDUCIALUFIDUCIAL  [FIDUCIAL-MICRO]  118.59,30.12 0 top
FID44  FIDUCIALUFIDUCIAL  [FIDUCIAL-MICRO]  105.31,25.68 0 top
FID45  FIDUCIALUFIDUCIAL  [FIDUCIAL-MICRO]  138.15,30.12 0 top
FID46  FIDUCIALUFIDUCIAL  [FIDUCIAL-MICRO]  124.87,25.68 0 top
FID47  FIDUCIALUFIDUCIAL  [FIDUCIAL-MICRO]  157.71,30.12 0 top
FID48  FIDUCIALUFIDUCIAL  [FIDUCIAL-MICRO]  144.42,25.68 0 top
FID49  FIDUCIALUFIDUCIAL  [FIDUCIAL-MICRO]  20.8,38.25 0 top
FID50  FIDUCIALUFIDUCIAL  [FIDUCIAL-MICRO]  7.52,33.81 0 top
FID51  FIDUCIALUFIDUCIAL  [FIDUCIAL-MICRO]  40.36,38.25 0 top
FID52  FIDUCIALUFIDUCIAL  [FIDUCIAL-MICRO]  27.08,33.81 0 top
FID53  FIDUCIALUFIDUCIAL  [FIDUCIAL-MICRO]  59.92,38.25 0 top
FID54  FIDUCIALUFIDUCIAL  [FIDUCIAL-MICRO]  46.63,33.81 0 top
FID55  FIDUCIALUFIDUCIAL  [FIDUCIAL-MICRO]  79.48,38.25 0 top
FID56  FIDUCIALUFIDUCIAL  [FIDUCIAL-MICRO]  66.19,33.81 0 top
FID57  FIDUCIALUFIDUCIAL  [FIDUCIAL-MICRO]  99.03,38.25 0 top
FID58  FIDUCIALUFIDUCIAL  [FIDUCIAL-MICRO]  85.75,33.81 0 top
FID59  FIDUCIALUFIDUCIAL  [FIDUCIAL-MICRO]  118.59,38.25 0 top
FID60  FIDUCIALUFIDUCIAL  [FIDUCIAL-MICRO]  105.31,33.81 0 top
FID61  FIDUCIALUFIDUCIAL  [FIDUCIAL-MICRO]  138.15,38.25 0 top
FID62  FIDUCIALUFIDUCIAL  [FIDUCIAL-MICRO]  124.87,33.81 0 top
FID63  FIDUCIALUFIDUCIAL  [FIDUCIAL-MICRO]  157.71,38.25 0 top
FID64  FIDUCIALUFIDUCIAL  [FIDUCIAL-MICRO]  144.42,33.81 0 top
FID65  FIDUCIALUFIDUCIAL  [FIDUCIAL-MICRO]  20.8,46.38 0 top
FID66  FIDUCIALUFIDUCIAL  [FIDUCIAL-MICRO]  7.52,41.94 0 top
FID67  FIDUCIALUFIDUCIAL  [FIDUCIAL-MICRO]  40.36,46.38 0 top
FID68  FIDUCIALUFIDUCIAL  [FIDUCIAL-MICRO]  27.08,41.94 0 top
FID69  FIDUCIALUFIDUCIAL  [FIDUCIAL-MICRO]  59.92,46.38 0 top
FID70  FIDUCIALUFIDUCIAL  [FIDUCIAL-MICRO]  46.63,41.94 0 top
FID71  FIDUCIALUFIDUCIAL  [FIDUCIAL-MICRO]  79.48,46.38 0 top
FID72  FIDUCIALUFIDUCIAL  [FIDUCIAL-MICRO]  66.19,41.94 0 top
FID73  FIDUCIALUFIDUCIAL  [FIDUCIAL-MICRO]  99.03,46.38 0 top
FID74  FIDUCIALUFIDUCIAL  [FIDUCIAL-MICRO]  85.75,41.94 0 top
FID75  FIDUCIALUFIDUCIAL  [FIDUCIAL-MICRO]  118.59,46.38 0 top
FID76  FIDUCIALUFIDUCIAL  [FIDUCIAL-MICRO]  105.31,41.94 0 top
FID77  FIDUCIALUFIDUCIAL  [FIDUCIAL-MICRO]  138.15,46.38 0 top
FID78  FIDUCIALUFIDUCIAL  [FIDUCIAL-MICRO]  124.87,41.94 0 top
FID79  FIDUCIALUFIDUCIAL  [FIDUCIAL-MICRO]  157.71,46.38 0 top
FID80  FIDUCIALUFIDUCIAL  [FIDUCIAL-MICRO]  144.42,41.94 0 top
FID81  FIDUCIALUFIDUCIAL  [FIDUCIAL-MICRO]  20.8,54.51 0 top
FID82  FIDUCIALUFIDUCIAL  [FIDUCIAL-MICRO]  7.52,50.06 0 top
FID83  FIDUCIALUFIDUCIAL  [FIDUCIAL-MICRO]  40.36,54.51 0 top
FID84  FIDUCIALUFIDUCIAL  [FIDUCIAL-MICRO]  27.08,50.06 0 top
FID85  FIDUCIALUFIDUCIAL  [FIDUCIAL-MICRO]  59.92,54.51 0 top
FID86  FIDUCIALUFIDUCIAL  [FIDUCIAL-MICRO]  46.63,50.06 0 top
FID87  FIDUCIALUFIDUCIAL  [FIDUCIAL-MICRO]  79.48,54.51 0 top
FID88  FIDUCIALUFIDUCIAL  [FIDUCIAL-MICRO]  66.19,50.06 0 top
FID89  FIDUCIALUFIDUCIAL  [FIDUCIAL-MICRO]  99.03,54.51 0 top
FID90  FIDUCIALUFIDUCIAL  [FIDUCIAL-MICRO]  85.75,50.06 0 top
FID91  FIDUCIALUFIDUCIAL  [FIDUCIAL-MICRO]  118.59,54.51 0 top
FID92  FIDUCIALUFIDUCIAL  [FIDUCIAL-MICRO]  105.31,50.06 0 top
FID93  FIDUCIALUFIDUCIAL  [FIDUCIAL-MICRO]  138.15,54.51 0 top
FID94  FIDUCIALUFIDUCIAL  [FIDUCIAL-MICRO]  124.87,50.06 0 top
FID95  FIDUCIALUFIDUCIAL  [FIDUCIAL-MICRO]  157.71,54.51 0 top
FID96  FIDUCIALUFIDUCIAL  [FIDUCIAL-MICRO]  144.42,50.06 0 top
FID97  FIDUCIALUFIDUCIAL  [FIDUCIAL-MICRO]  20.8,62.64 0 top
FID98  FIDUCIALUFIDUCIAL  [FIDUCIAL-MICRO]  7.52,58.19 0 top
FID99  FIDUCIALUFIDUCIAL  [FIDUCIAL-MICRO]  40.36,62.64 0 top
FID100  FIDUCIALUFIDUCIAL  [FIDUCIAL-MICRO]  27.08,58.19 0 top
FID101  FIDUCIALUFIDUCIAL  [FIDUCIAL-MICRO]  59.92,62.64 0 top
FID102  FIDUCIALUFIDUCIAL  [FIDUCIAL-MICRO]  46.63,58.19 0 top
FID103  FIDUCIALUFIDUCIAL  [FIDUCIAL-MICRO]  79.48,62.64 0 top
FID104  FIDUCIALUFIDUCIAL  [FIDUCIAL-MICRO]  66.19,58.19 0 top
FID105  FIDUCIALUFIDUCIAL  [FIDUCIAL-MICRO]  99.03,62.64 0 top
FID106  FIDUCIALUFIDUCIAL  [FIDUCIAL-MICRO]  85.75,58.19 0 top
FID107  FIDUCIALUFIDUCIAL  [FIDUCIAL-MICRO]  118.59,62.64 0 top
FID108  FIDUCIALUFIDUCIAL  [FIDUCIAL-MICRO]  105.31,58.19 0 top
FID109  FIDUCIALUFIDUCIAL  [FIDUCIAL-MICRO]  138.15,62.64 0 top
FID110  FIDUCIALUFIDUCIAL  [FIDUCIAL-MICRO]  124.87,58.19 0 top
FID111  FIDUCIALUFIDUCIAL  [FIDUCIAL-MICRO]  157.71,62.64 0 top
FID112  FIDUCIALUFIDUCIAL  [FIDUCIAL-MICRO]  144.42,58.19 0 top
FID113  FIDUCIALUFIDUCIAL  [FIDUCIAL-MICRO]  20.8,70.76 0 top
FID114  FIDUCIALUFIDUCIAL  [FIDUCIAL-MICRO]  7.52,66.32 0 top
FID115  FIDUCIALUFIDUCIAL  [FIDUCIAL-MICRO]  40.36,70.76 0 top
FID116  FIDUCIALUFIDUCIAL  [FIDUCIAL-MICRO]  27.08,66.32 0 top
FID117  FIDUCIALUFIDUCIAL  [FIDUCIAL-MICRO]  59.92,70.76 0 top
FID118  FIDUCIALUFIDUCIAL  [FIDUCIAL-MICRO]  46.63,66.32 0 top
FID119  FIDUCIALUFIDUCIAL  [FIDUCIAL-MICRO]  79.48,70.76 0 top
FID120  FIDUCIALUFIDUCIAL  [FIDUCIAL-MICRO]  66.19,66.32 0 top
FID121  FIDUCIALUFIDUCIAL  [FIDUCIAL-MICRO]  99.03,70.76 0 top
FID122  FIDUCIALUFIDUCIAL  [FIDUCIAL-MICRO]  85.75,66.32 0 top
FID123  FIDUCIALUFIDUCIAL  [FIDUCIAL-MICRO]  118.59,70.76 0 top
FID124  FIDUCIALUFIDUCIAL  [FIDUCIAL-MICRO]  105.31,66.32 0 top
FID125  FIDUCIALUFIDUCIAL  [FIDUCIAL-MICRO]  138.15,70.76 0 top
FID126  FIDUCIALUFIDUCIAL  [FIDUCIAL-MICRO]  124.87,66.32 0 top
FID127  FIDUCIALUFIDUCIAL  [FIDUCIAL-MICRO]  157.71,70.76 0 top
FID128  FIDUCIALUFIDUCIAL  [FIDUCIAL-MICRO]  144.42,66.32 0 top
I2C_PU  S_MODE  [SMT-JUMPER_3_2-NC_TRACE_SILK]  21.55,10.67 270 bottom
I2C_PU1  S_MODE  [SMT-JUMPER_3_2-NC_TRACE_SILK]  41.1,10.67 270 bottom
I2C_PU2  S_MODE  [SMT-JUMPER_3_2-NC_TRACE_SILK]  60.66,10.67 270 bottom
I2C_PU3  S_MODE  [SMT-JUMPER_3_2-NC_TRACE_SILK]  80.22,10.67 270 bottom
I2C_PU4  S_MODE  [SMT-JUMPER_3_2-NC_TRACE_SILK]  99.78,10.67 270 bottom
I2C_PU5  S_MODE  [SMT-JUMPER_3_2-NC_TRACE_SILK]  119.34,10.67 270 bottom
I2C_PU6  S_MODE  [SMT-JUMPER_3_2-NC_TRACE_SILK]  138.89,10.67 270 bottom
I2C_PU7  S_MODE  [SMT-JUMPER_3_2-NC_TRACE_SILK]  158.45,10.67 270 bottom
I2C_PU8  S_MODE  [SMT-JUMPER_3_2-NC_TRACE_SILK]  21.55,18.8 270 bottom
I2C_PU9  S_MODE  [SMT-JUMPER_3_2-NC_TRACE_SILK]  41.1,18.8 270 bottom
I2C_PU10  S_MODE  [SMT-JUMPER_3_2-NC_TRACE_SILK]  60.66,18.8 270 bottom
I2C_PU11  S_MODE  [SMT-JUMPER_3_2-NC_TRACE_SILK]  80.22,18.8 270 bottom
I2C_PU12  S_MODE  [SMT-JUMPER_3_2-NC_TRACE_SILK]  99.78,18.8 270 bottom
I2C_PU13  S_MODE  [SMT-JUMPER_3_2-NC_TRACE_SILK]  119.34,18.8 270 bottom
I2C_PU14  S_MODE  [SMT-JUMPER_3_2-NC_TRACE_SILK]  138.89,18.8 270 bottom
I2C_PU15  S_MODE  [SMT-JUMPER_3_2-NC_TRACE_SILK]  158.45,18.8 270 bottom
I2C_PU16  S_MODE  [SMT-JUMPER_3_2-NC_TRACE_SILK]  21.55,26.92 270 bottom
I2C_PU17  S_MODE  [SMT-JUMPER_3_2-NC_TRACE_SILK]  41.1,26.92 270 bottom
I2C_PU18  S_MODE  [SMT-JUMPER_3_2-NC_TRACE_SILK]  60.66,26.92 270 bottom
I2C_PU19  S_MODE  [SMT-JUMPER_3_2-NC_TRACE_SILK]  80.22,26.92 270 bottom
I2C_PU20  S_MODE  [SMT-JUMPER_3_2-NC_TRACE_SILK]  99.78,26.92 270 bottom
I2C_PU21  S_MODE  [SMT-JUMPER_3_2-NC_TRACE_SILK]  119.34,26.92 270 bottom
I2C_PU22  S_MODE  [SMT-JUMPER_3_2-NC_TRACE_SILK]  138.89,26.92 270 bottom
I2C_PU23  S_MODE  [SMT-JUMPER_3_2-NC_TRACE_SILK]  158.45,26.92 270 bottom
I2C_PU24  S_MODE  [SMT-JUMPER_3_2-NC_TRACE_SILK]  21.55,35.05 270 bottom
I2C_PU25  S_MODE  [SMT-JUMPER_3_2-NC_TRACE_SILK]  41.1,35.05 270 bottom
I2C_PU26  S_MODE  [SMT-JUMPER_3_2-NC_TRACE_SILK]  60.66,35.05 270 bottom
I2C_PU27  S_MODE  [SMT-JUMPER_3_2-NC_TRACE_SILK]  80.22,35.05 270 bottom
I2C_PU28  S_MODE  [SMT-JUMPER_3_2-NC_TRACE_SILK]  99.78,35.05 270 bottom
I2C_PU29  S_MODE  [SMT-JUMPER_3_2-NC_TRACE_SILK]  119.34,35.05 270 bottom
I2C_PU30  S_MODE  [SMT-JUMPER_3_2-NC_TRACE_SILK]  138.89,35.05 270 bottom
I2C_PU31  S_MODE  [SMT-JUMPER_3_2-NC_TRACE_SILK]  158.45,35.05 270 bottom
I2C_PU32  S_MODE  [SMT-JUMPER_3_2-NC_TRACE_SILK]  21.55,43.18 270 bottom
I2C_PU33  S_MODE  [SMT-JUMPER_3_2-NC_TRACE_SILK]  41.1,43.18 270 bottom
I2C_PU34  S_MODE  [SMT-JUMPER_3_2-NC_TRACE_SILK]  60.66,43.18 270 bottom
I2C_PU35  S_MODE  [SMT-JUMPER_3_2-NC_TRACE_SILK]  80.22,43.18 270 bottom
I2C_PU36  S_MODE  [SMT-JUMPER_3_2-NC_TRACE_SILK]  99.78,43.18 270 bottom
I2C_PU37  S_MODE  [SMT-JUMPER_3_2-NC_TRACE_SILK]  119.34,43.18 270 bottom
I2C_PU38  S_MODE  [SMT-JUMPER_3_2-NC_TRACE_SILK]  138.89,43.18 270 bottom
I2C_PU39  S_MODE  [SMT-JUMPER_3_2-NC_TRACE_SILK]  158.45,43.18 270 bottom
I2C_PU40  S_MODE  [SMT-JUMPER_3_2-NC_TRACE_SILK]  21.55,51.31 270 bottom
I2C_PU41  S_MODE  [SMT-JUMPER_3_2-NC_TRACE_SILK]  41.1,51.31 270 bottom
I2C_PU42  S_MODE  [SMT-JUMPER_3_2-NC_TRACE_SILK]  60.66,51.31 270 bottom
I2C_PU43  S_MODE  [SMT-JUMPER_3_2-NC_TRACE_SILK]  80.22,51.31 270 bottom
I2C_PU44  S_MODE  [SMT-JUMPER_3_2-NC_TRACE_SILK]  99.78,51.31 270 bottom
I2C_PU45  S_MODE  [SMT-JUMPER_3_2-NC_TRACE_SILK]  119.34,51.31 270 bottom
I2C_PU46  S_MODE  [SMT-JUMPER_3_2-NC_TRACE_SILK]  138.89,51.31 270 bottom
I2C_PU47  S_MODE  [SMT-JUMPER_3_2-NC_TRACE_SILK]  158.45,51.31 270 bottom
I2C_PU48  S_MODE  [SMT-JUMPER_3_2-NC_TRACE_SILK]  21.55,59.44 270 bottom
I2C_PU49  S_MODE  [SMT-JUMPER_3_2-NC_TRACE_SILK]  41.1,59.44 270 bottom
I2C_PU50  S_MODE  [SMT-JUMPER_3_2-NC_TRACE_SILK]  60.66,59.44 270 bottom
I2C_PU51  S_MODE  [SMT-JUMPER_3_2-NC_TRACE_SILK]  80.22,59.44 270 bottom
I2C_PU52  S_MODE  [SMT-JUMPER_3_2-NC_TRACE_SILK]  99.78,59.44 270 bottom
I2C_PU53  S_MODE  [SMT-JUMPER_3_2-NC_TRACE_SILK]  119.34,59.44 270 bottom
I2C_PU54  S_MODE  [SMT-JUMPER_3_2-NC_TRACE_SILK]  138.89,59.44 270 bottom
I2C_PU55  S_MODE  [SMT-JUMPER_3_2-NC_TRACE_SILK]  158.45,59.44 270 bottom
I2C_PU56  S_MODE  [SMT-JUMPER_3_2-NC_TRACE_SILK]  21.55,67.56 270 bottom
I2C_PU57  S_MODE  [SMT-JUMPER_3_2-NC_TRACE_SILK]  41.1,67.56 270 bottom
I2C_PU58  S_MODE  [SMT-JUMPER_3_2-NC_TRACE_SILK]  60.66,67.56 270 bottom
I2C_PU59  S_MODE  [SMT-JUMPER_3_2-NC_TRACE_SILK]  80.22,67.56 270 bottom
I2C_PU60  S_MODE  [SMT-JUMPER_3_2-NC_TRACE_SILK]  99.78,67.56 270 bottom
I2C_PU61  S_MODE  [SMT-JUMPER_3_2-NC_TRACE_SILK]  119.34,67.56 270 bottom
I2C_PU62  S_MODE  [SMT-JUMPER_3_2-NC_TRACE_SILK]  138.89,67.56 270 bottom
I2C_PU63  S_MODE  [SMT-JUMPER_3_2-NC_TRACE_SILK]  158.45,67.56 270 bottom
J1  Qwiic Right Angle  [JST04_1MM_RA]  20.83,10.67 90 top
J2  Qwiic Right Angle  [JST04_1MM_RA]  40.39,10.67 90 top
J3  [1X01_1MM_NO_SILK]  11.94,8.13 0 top
J4  [1X01_1MM_NO_SILK]  11.94,13.21 0 top
J5  [1X01_1MM_NO_SILK]  31.5,8.13 0 top
J6  [1X01_1MM_NO_SILK]  31.5,13.21 0 top
J7  Qwiic Right Angle  [JST04_1MM_RA]  59.94,10.67 90 top
J8  [1X01_1MM_NO_SILK]  51.05,8.13 0 top
J9  [1X01_1MM_NO_SILK]  51.05,13.21 0 top
J10  Qwiic Right Angle  [JST04_1MM_RA]  79.5,10.67 90 top
J11  [1X01_1MM_NO_SILK]  70.61,8.13 0 top
J12  [1X01_1MM_NO_SILK]  70.61,13.21 0 top
J13  Qwiic Right Angle  [JST04_1MM_RA]  99.06,10.67 90 top
J14  [1X01_1MM_NO_SILK]  90.17,8.13 0 top
J15  [1X01_1MM_NO_SILK]  90.17,13.21 0 top
J16  Qwiic Right Angle  [JST04_1MM_RA]  118.62,10.67 90 top
J17  [1X01_1MM_NO_SILK]  109.73,8.13 0 top
J18  [1X01_1MM_NO_SILK]  109.73,13.21 0 top
J19  Qwiic Right Angle  [JST04_1MM_RA]  138.18,10.67 90 top
J20  [1X01_1MM_NO_SILK]  129.29,8.13 0 top
J21  [1X01_1MM_NO_SILK]  129.29,13.21 0 top
J22  Qwiic Right Angle  [JST04_1MM_RA]  157.73,10.67 90 top
J23  [1X01_1MM_NO_SILK]  148.84,8.13 0 top
J24  [1X01_1MM_NO_SILK]  148.84,13.21 0 top
J25  Qwiic Right Angle  [JST04_1MM_RA]  20.83,18.8 90 top
J26  [1X01_1MM_NO_SILK]  11.94,16.26 0 top
J27  [1X01_1MM_NO_SILK]  11.94,21.34 0 top
J28  Qwiic Right Angle  [JST04_1MM_RA]  40.39,18.8 90 top
J29  [1X01_1MM_NO_SILK]  31.5,16.26 0 top
J30  [1X01_1MM_NO_SILK]  31.5,21.34 0 top
J31  Qwiic Right Angle  [JST04_1MM_RA]  59.94,18.8 90 top
J32  [1X01_1MM_NO_SILK]  51.05,16.26 0 top
J33  [1X01_1MM_NO_SILK]  51.05,21.34 0 top
J34  Qwiic Right Angle  [JST04_1MM_RA]  79.5,18.8 90 top
J35  [1X01_1MM_NO_SILK]  70.61,16.26 0 top
J36  [1X01_1MM_NO_SILK]  70.61,21.34 0 top
J37  Qwiic Right Angle  [JST04_1MM_RA]  99.06,18.8 90 top
J38  [1X01_1MM_NO_SILK]  90.17,16.26 0 top
J39  [1X01_1MM_NO_SILK]  90.17,21.34 0 top
J40  Qwiic Right Angle  [JST04_1MM_RA]  118.62,18.8 90 top
J41  [1X01_1MM_NO_SILK]  109.73,16.26 0 top
J42  [1X01_1MM_NO_SILK]  109.73,21.34 0 top
J43  Qwiic Right Angle  [JST04_1MM_RA]  138.18,18.8 90 top
J44  [1X01_1MM_NO_SILK]  129.29,16.26 0 top
J45  [1X01_1MM_NO_SILK]  129.29,21.34 0 top
J46  Qwiic Right Angle  [JST04_1MM_RA]  157.73,18.8 90 top
J47  [1X01_1MM_NO_SILK]  148.84,16.26 0 top
J48  [1X01_1MM_NO_SILK]  148.84,21.34 0 top
J49  Qwiic Right Angle  [JST04_1MM_RA]  20.83,26.92 90 top
J50  [1X01_1MM_NO_SILK]  11.94,24.38 0 top
J51  [1X01_1MM_NO_SILK]  11.94,29.46 0 top
J52  Qwiic Right Angle  [JST04_1MM_RA]  40.39,26.92 90 top
J53  [1X01_1MM_NO_SILK]  31.5,24.38 0 top
J54  [1X01_1MM_NO_SILK]  31.5,29.46 0 top
J55  Qwiic Right Angle  [JST04_1MM_RA]  59.94,26.92 90 top
J56  [1X01_1MM_NO_SILK]  51.05,24.38 0 top
J57  [1X01_1MM_NO_SILK]  51.05,29.46 0 top
J58  Qwiic Right Angle  [JST04_1MM_RA]  79.5,26.92 90 top
J59  [1X01_1MM_NO_SILK]  70.61,24.38 0 top
J60  [1X01_1MM_NO_SILK]  70.61,29.46 0 top
J61  Qwiic Right Angle  [JST04_1MM_RA]  99.06,26.92 90 top
J62  [1X01_1MM_NO_SILK]  90.17,24.38 0 top
J63  [1X01_1MM_NO_SILK]  90.17,29.46 0 top
J64  Qwiic Right Angle  [JST04_1MM_RA]  118.62,26.92 90 top
J65  [1X01_1MM_NO_SILK]  109.73,24.38 0 top
J66  [1X01_1MM_NO_SILK]  109.73,29.46 0 top
J67  Qwiic Right Angle  [JST04_1MM_RA]  138.18,26.92 90 top
J68  [1X01_1MM_NO_SILK]  129.29,24.38 0 top
J69  [1X01_1MM_NO_SILK]  129.29,29.46 0 top
J70  Qwiic Right Angle  [JST04_1MM_RA]  157.73,26.92 90 top
J71  [1X01_1MM_NO_SILK]  148.84,24.38 0 top
J72  [1X01_1MM_NO_SILK]  148.84,29.46 0 top
J73  Qwiic Right Angle  [JST04_1MM_RA]  20.83,35.05 90 top
J74  [1X01_1MM_NO_SILK]  11.94,32.51 0 top
J75  [1X01_1MM_NO_SILK]  11.94,37.59 0 top
J76  Qwiic Right Angle  [JST04_1MM_RA]  40.39,35.05 90 top
J77  [1X01_1MM_NO_SILK]  31.5,32.51 0 top
J78  [1X01_1MM_NO_SILK]  31.5,37.59 0 top
J79  Qwiic Right Angle  [JST04_1MM_RA]  59.94,35.05 90 top
J80  [1X01_1MM_NO_SILK]  51.05,32.51 0 top
J81  [1X01_1MM_NO_SILK]  51.05,37.59 0 top
J82  Qwiic Right Angle  [JST04_1MM_RA]  79.5,35.05 90 top
J83  [1X01_1MM_NO_SILK]  70.61,32.51 0 top
J84  [1X01_1MM_NO_SILK]  70.61,37.59 0 top
J85  Qwiic Right Angle  [JST04_1MM_RA]  99.06,35.05 90 top
J86  [1X01_1MM_NO_SILK]  90.17,32.51 0 top
J87  [1X01_1MM_NO_SILK]  90.17,37.59 0 top
J88  Qwiic Right Angle  [JST04_1MM_RA]  118.62,35.05 90 top
J89  [1X01_1MM_NO_SILK]  109.73,32.51 0 top
J90  [1X01_1MM_NO_SILK]  109.73,37.59 0 top
J91  Qwiic Right Angle  [JST04_1MM_RA]  138.18,35.05 90 top
J92  [1X01_1MM_NO_SILK]  129.29,32.51 0 top
J93  [1X01_1MM_NO_SILK]  129.29,37.59 0 top
J94  Qwiic Right Angle  [JST04_1MM_RA]  157.73,35.05 90 top
J95  [1X01_1MM_NO_SILK]  148.84,32.51 0 top
J96  [1X01_1MM_NO_SILK]  148.84,37.59 0 top
J97  Qwiic Right Angle  [JST04_1MM_RA]  20.83,43.18 90 top
J98  [1X01_1MM_NO_SILK]  11.94,40.64 0 top
J99  [1X01_1MM_NO_SILK]  11.94,45.72 0 top
J100  Qwiic Right Angle  [JST04_1MM_RA]  40.39,43.18 90 top
J101  [1X01_1MM_NO_SILK]  31.5,40.64 0 top
J102  [1X01_1MM_NO_SILK]  31.5,45.72 0 top
J103  Qwiic Right Angle  [JST04_1MM_RA]  59.94,43.18 90 top
J104  [1X01_1MM_NO_SILK]  51.05,40.64 0 top
J105  [1X01_1MM_NO_SILK]  51.05,45.72 0 top
J106  Qwiic Right Angle  [JST04_1MM_RA]  79.5,43.18 90 top
J107  [1X01_1MM_NO_SILK]  70.61,40.64 0 top
J108  [1X01_1MM_NO_SILK]  70.61,45.72 0 top
J109  Qwiic Right Angle  [JST04_1MM_RA]  99.06,43.18 90 top
J110  [1X01_1MM_NO_SILK]  90.17,40.64 0 top
J111  [1X01_1MM_NO_SILK]  90.17,45.72 0 top
J112  Qwiic Right Angle  [JST04_1MM_RA]  118.62,43.18 90 top
J113  [1X01_1MM_NO_SILK]  109.73,40.64 0 top
J114  [1X01_1MM_NO_SILK]  109.73,45.72 0 top
J115  Qwiic Right Angle  [JST04_1MM_RA]  138.18,43.18 90 top
J116  [1X01_1MM_NO_SILK]  129.29,40.64 0 top
J117  [1X01_1MM_NO_SILK]  129.29,45.72 0 top
J118  Qwiic Right Angle  [JST04_1MM_RA]  157.73,43.18 90 top
J119  [1X01_1MM_NO_SILK]  148.84,40.64 0 top
J120  [1X01_1MM_NO_SILK]  148.84,45.72 0 top
J121  Qwiic Right Angle  [JST04_1MM_RA]  20.83,51.31 90 top
J122  [1X01_1MM_NO_SILK]  11.94,48.77 0 top
J123  [1X01_1MM_NO_SILK]  11.94,53.85 0 top
J124  Qwiic Right Angle  [JST04_1MM_RA]  40.39,51.31 90 top
J125  [1X01_1MM_NO_SILK]  31.5,48.77 0 top
J126  [1X01_1MM_NO_SILK]  31.5,53.85 0 top
J127  Qwiic Right Angle  [JST04_1MM_RA]  59.94,51.31 90 top
J128  [1X01_1MM_NO_SILK]  51.05,48.77 0 top
J129  [1X01_1MM_NO_SILK]  51.05,53.85 0 top
J130  Qwiic Right Angle  [JST04_1MM_RA]  79.5,51.31 90 top
J131  [1X01_1MM_NO_SILK]  70.61,48.77 0 top
J132  [1X01_1MM_NO_SILK]  70.61,53.85 0 top
J133  Qwiic Right Angle  [JST04_1MM_RA]  99.06,51.31 90 top
J134  [1X01_1MM_NO_SILK]  90.17,48.77 0 top
J135  [1X01_1MM_NO_SILK]  90.17,53.85 0 top
J136  Qwiic Right Angle  [JST04_1MM_RA]  118.62,51.31 90 top
J137  [1X01_1MM_NO_SILK]  109.73,48.77 0 top
J138  [1X01_1MM_NO_SILK]  109.73,53.85 0 top
J139  Qwiic Right Angle  [JST04_1MM_RA]  138.18,51.31 90 top
J140  [1X01_1MM_NO_SILK]  129.29,48.77 0 top
J141  [1X01_1MM_NO_SILK]  129.29,53.85 0 top
J142  Qwiic Right Angle  [JST04_1MM_RA]  157.73,51.31 90 top
J143  [1X01_1MM_NO_SILK]  148.84,48.77 0 top
J144  [1X01_1MM_NO_SILK]  148.84,53.85 0 top
J145  Qwiic Right Angle  [JST04_1MM_RA]  20.83,59.44 90 top
J146  [1X01_1MM_NO_SILK]  11.94,56.9 0 top
J147  [1X01_1MM_NO_SILK]  11.94,61.98 0 top
J148  Qwiic Right Angle  [JST04_1MM_RA]  40.39,59.44 90 top
J149  [1X01_1MM_NO_SILK]  31.5,56.9 0 top
J150  [1X01_1MM_NO_SILK]  31.5,61.98 0 top
J151  Qwiic Right Angle  [JST04_1MM_RA]  59.94,59.44 90 top
J152  [1X01_1MM_NO_SILK]  51.05,56.9 0 top
J153  [1X01_1MM_NO_SILK]  51.05,61.98 0 top
J154  Qwiic Right Angle  [JST04_1MM_RA]  79.5,59.44 90 top
J155  [1X01_1MM_NO_SILK]  70.61,56.9 0 top
J156  [1X01_1MM_NO_SILK]  70.61,61.98 0 top
J157  Qwiic Right Angle  [JST04_1MM_RA]  99.06,59.44 90 top
J158  [1X01_1MM_NO_SILK]  90.17,56.9 0 top
J159  [1X01_1MM_NO_SILK]  90.17,61.98 0 top
J160  Qwiic Right Angle  [JST04_1MM_RA]  118.62,59.44 90 top
J161  [1X01_1MM_NO_SILK]  109.73,56.9 0 top
J162  [1X01_1MM_NO_SILK]  109.73,61.98 0 top
J163  Qwiic Right Angle  [JST04_1MM_RA]  138.18,59.44 90 top
J164  [1X01_1MM_NO_SILK]  129.29,56.9 0 top
J165  [1X01_1MM_NO_SILK]  129.29,61.98 0 top
J166  Qwiic Right Angle  [JST04_1MM_RA]  157.73,59.44 90 top
J167  [1X01_1MM_NO_SILK]  148.84,56.9 0 top
J168  [1X01_1MM_NO_SILK]  148.84,61.98 0 top
J169  Qwiic Right Angle  [JST04_1MM_RA]  20.83,67.56 90 top
J170  [1X01_1MM_NO_SILK]  11.94,65.02 0 top
J171  [1X01_1MM_NO_SILK]  11.94,70.1 0 top
J172  Qwiic Right Angle  [JST04_1MM_RA]  40.39,67.56 90 top
J173  [1X01_1MM_NO_SILK]  31.5,65.02 0 top
J174  [1X01_1MM_NO_SILK]  31.5,70.1 0 top
J175  Qwiic Right Angle  [JST04_1MM_RA]  59.94,67.56 90 top
J176  [1X01_1MM_NO_SILK]  51.05,65.02 0 top
J177  [1X01_1MM_NO_SILK]  51.05,70.1 0 top
J178  Qwiic Right Angle  [JST04_1MM_RA]  79.5,67.56 90 top
J179  [1X01_1MM_NO_SILK]  70.61,65.02 0 top
J180  [1X01_1MM_NO_SILK]  70.61,70.1 0 top
J181  Qwiic Right Angle  [JST04_1MM_RA]  99.06,67.56 90 top
J182  [1X01_1MM_NO_SILK]  90.17,65.02 0 top
J183  [1X01_1MM_NO_SILK]  90.17,70.1 0 top
J184  Qwiic Right Angle  [JST04_1MM_RA]  118.62,67.56 90 top
J185  [1X01_1MM_NO_SILK]  109.73,65.02 0 top
J186  [1X01_1MM_NO_SILK]  109.73,70.1 0 top
J187  Qwiic Right Angle  [JST04_1MM_RA]  138.18,67.56 90 top
J188  [1X01_1MM_NO_SILK]  129.29,65.02 0 top
J189  [1X01_1MM_NO_SILK]  129.29,70.1 0 top
J190  Qwiic Right Angle  [JST04_1MM_RA]  157.73,67.56 90 top
J191  [1X01_1MM_NO_SILK]  148.84,65.02 0 top
J192  [1X01_1MM_NO_SILK]  148.84,70.1 0 top
LED  JUMPER-SMT_2_NC_TRACE_SILK  [SMT-JUMPER_2_NC_TRACE_SILK]  16.56,13.11 90 bottom
LED1  JUMPER-SMT_2_NC_TRACE_SILK  [SMT-JUMPER_2_NC_TRACE_SILK]  36.12,13.11 90 bottom
LED2  JUMPER-SMT_2_NC_TRACE_SILK  [SMT-JUMPER_2_NC_TRACE_SILK]  55.68,13.11 90 bottom
LED3  JUMPER-SMT_2_NC_TRACE_SILK  [SMT-JUMPER_2_NC_TRACE_SILK]  75.23,13.11 90 bottom
LED4  JUMPER-SMT_2_NC_TRACE_SILK  [SMT-JUMPER_2_NC_TRACE_SILK]  94.79,13.11 90 bottom
LED5  JUMPER-SMT_2_NC_TRACE_SILK  [SMT-JUMPER_2_NC_TRACE_SILK]  114.35,13.11 90 bottom
LED6  JUMPER-SMT_2_NC_TRACE_SILK  [SMT-JUMPER_2_NC_TRACE_SILK]  133.91,13.11 90 bottom
LED7  JUMPER-SMT_2_NC_TRACE_SILK  [SMT-JUMPER_2_NC_TRACE_SILK]  153.47,13.11 90 bottom
LED8  JUMPER-SMT_2_NC_TRACE_SILK  [SMT-JUMPER_2_NC_TRACE_SILK]  16.56,21.23 90 bottom
LED9  JUMPER-SMT_2_NC_TRACE_SILK  [SMT-JUMPER_2_NC_TRACE_SILK]  36.12,21.23 90 bottom
LED10  JUMPER-SMT_2_NC_TRACE_SILK  [SMT-JUMPER_2_NC_TRACE_SILK]  55.68,21.23 90 bottom
LED11  JUMPER-SMT_2_NC_TRACE_SILK  [SMT-JUMPER_2_NC_TRACE_SILK]  75.23,21.23 90 bottom
LED12  JUMPER-SMT_2_NC_TRACE_SILK  [SMT-JUMPER_2_NC_TRACE_SILK]  94.79,21.23 90 bottom
LED13  JUMPER-SMT_2_NC_TRACE_SILK  [SMT-JUMPER_2_NC_TRACE_SILK]  114.35,21.23 90 bottom
LED14  JUMPER-SMT_2_NC_TRACE_SILK  [SMT-JUMPER_2_NC_TRACE_SILK]  133.91,21.23 90 bottom
LED15  JUMPER-SMT_2_NC_TRACE_SILK  [SMT-JUMPER_2_NC_TRACE_SILK]  153.47,21.23 90 bottom
LED16  JUMPER-SMT_2_NC_TRACE_SILK  [SMT-JUMPER_2_NC_TRACE_SILK]  16.56,29.36 90 bottom
LED17  JUMPER-SMT_2_NC_TRACE_SILK  [SMT-JUMPER_2_NC_TRACE_SILK]  36.12,29.36 90 bottom
LED18  JUMPER-SMT_2_NC_TRACE_SILK  [SMT-JUMPER_2_NC_TRACE_SILK]  55.68,29.36 90 bottom
LED19  JUMPER-SMT_2_NC_TRACE_SILK  [SMT-JUMPER_2_NC_TRACE_SILK]  75.23,29.36 90 bottom
LED20  JUMPER-SMT_2_NC_TRACE_SILK  [SMT-JUMPER_2_NC_TRACE_SILK]  94.79,29.36 90 bottom
LED21  JUMPER-SMT_2_NC_TRACE_SILK  [SMT-JUMPER_2_NC_TRACE_SILK]  114.35,29.36 90 bottom
LED22  JUMPER-SMT_2_NC_TRACE_SILK  [SMT-JUMPER_2_NC_TRACE_SILK]  133.91,29.36 90 bottom
LED23  JUMPER-SMT_2_NC_TRACE_SILK  [SMT-JUMPER_2_NC_TRACE_SILK]  153.47,29.36 90 bottom
LED24  JUMPER-SMT_2_NC_TRACE_SILK  [SMT-JUMPER_2_NC_TRACE_SILK]  16.56,37.49 90 bottom
LED25  JUMPER-SMT_2_NC_TRACE_SILK  [SMT-JUMPER_2_NC_TRACE_SILK]  36.12,37.49 90 bottom
LED26  JUMPER-SMT_2_NC_TRACE_SILK  [SMT-JUMPER_2_NC_TRACE_SILK]  55.68,37.49 90 bottom
LED27  JUMPER-SMT_2_NC_TRACE_SILK  [SMT-JUMPER_2_NC_TRACE_SILK]  75.23,37.49 90 bottom
LED28  JUMPER-SMT_2_NC_TRACE_SILK  [SMT-JUMPER_2_NC_TRACE_SILK]  94.79,37.49 90 bottom
LED29  JUMPER-SMT_2_NC_TRACE_SILK  [SMT-JUMPER_2_NC_TRACE_SILK]  114.35,37.49 90 bottom
LED30  JUMPER-SMT_2_NC_TRACE_SILK  [SMT-JUMPER_2_NC_TRACE_SILK]  133.91,37.49 90 bottom
LED31  JUMPER-SMT_2_NC_TRACE_SILK  [SMT-JUMPER_2_NC_TRACE_SILK]  153.47,37.49 90 bottom